# EAGLE board PCB101_A (EAGLE 9.3.1), part 1 of 2
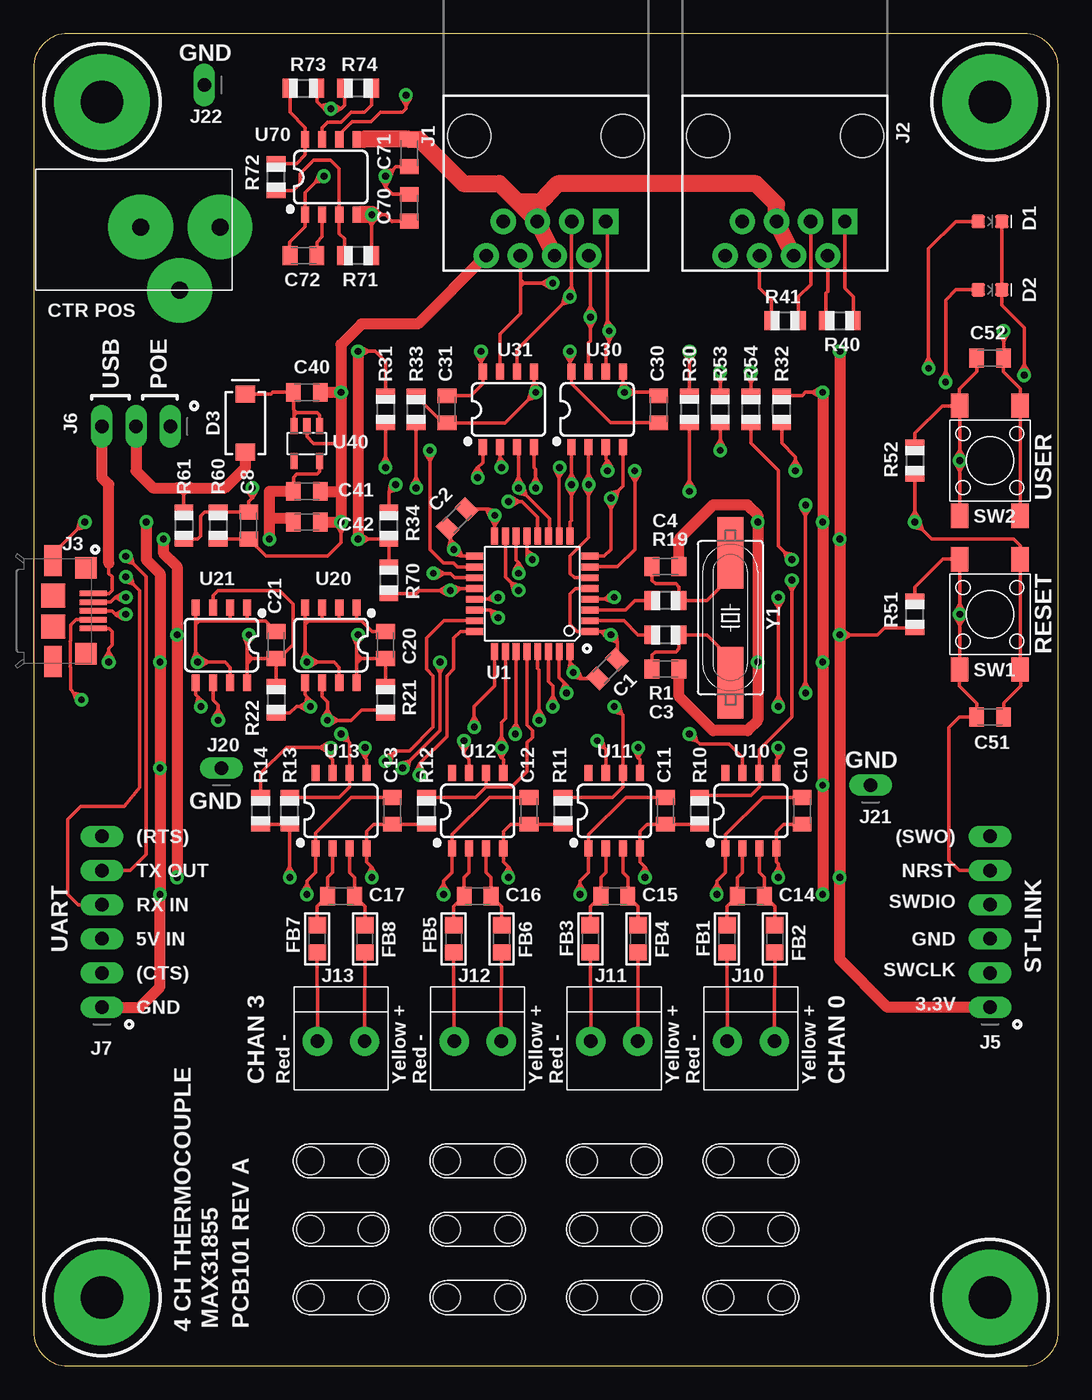
[diagram p0: board, top side]
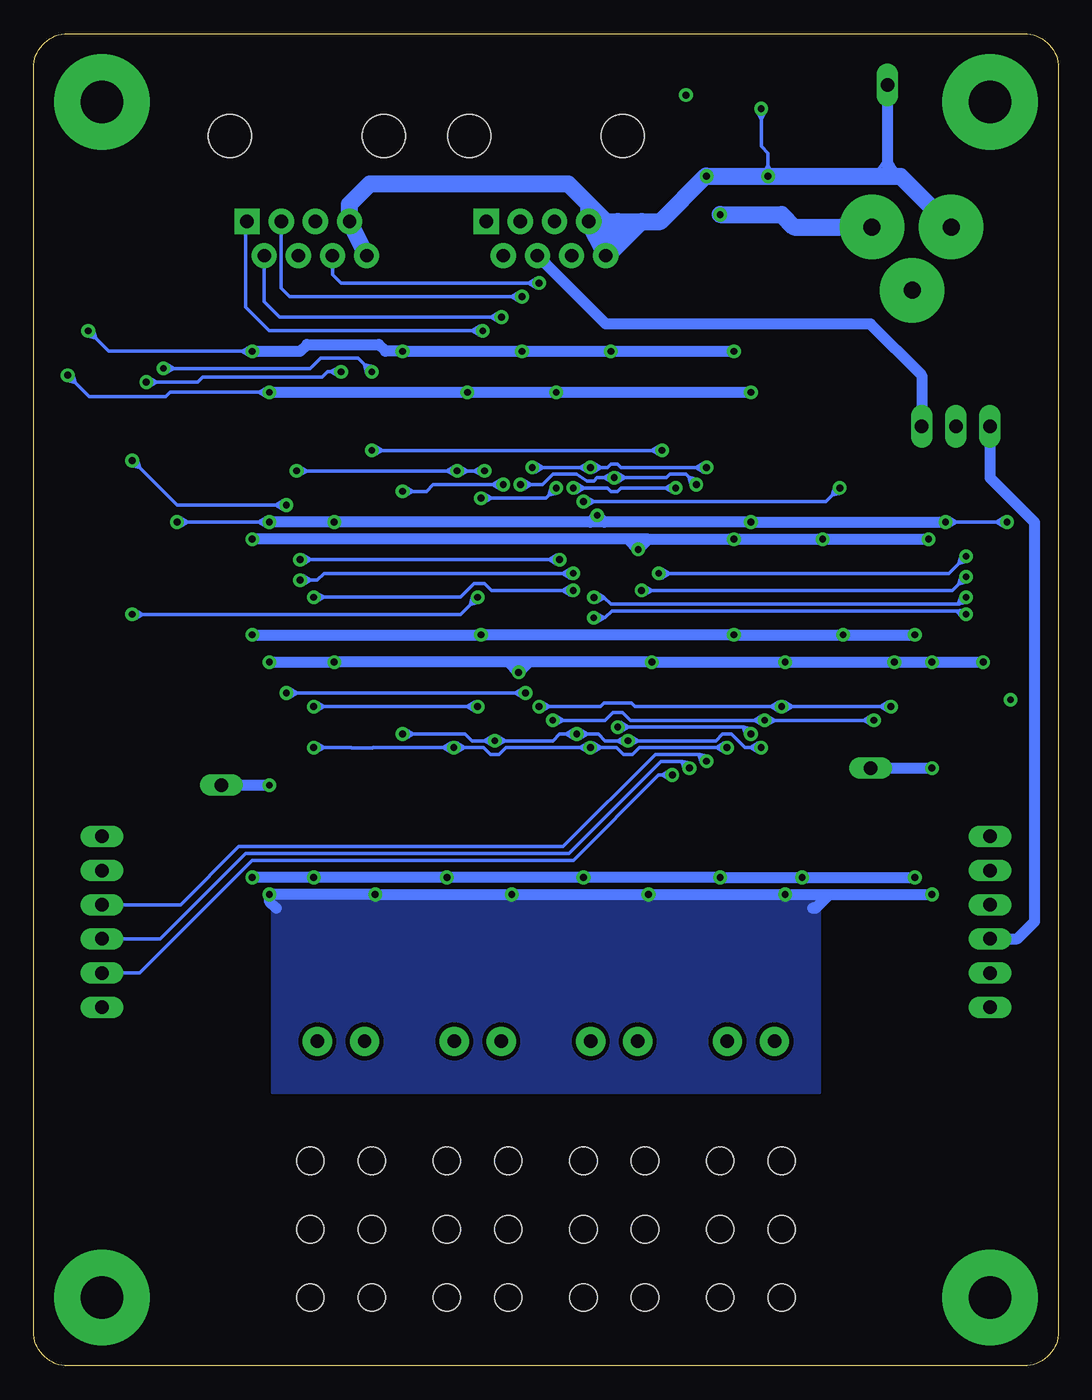
[diagram p1: board, bottom side, seen from below]

Size 76.2 x 99.06 mm. Coordinates in mm from the lower left corner, seen from the top.
Outline: 76.2,96.52 arc90 73.66,99.06 2.54,99.06 arc90 0,96.52 0,2.54 arc90 2.54,0 73.66,0 arc90 76.2,2.54 76.2,96.52
Copper layers (1*16): Top 0.035mm / dielectric 1.5mm / Bottom 0.035mm
Design rules "SparkFun-design-rules *": minimum track width 8mil, minimum drill 20mil, track to track 8mil, track to pad 8mil, pad to pad 8mil, via to via 8mil, smd to smd 8mil, copper to edge 10mil, drill to drill 8mil, minimum pad ring 12mil, minimum via ring 10mil, stop-mask expansion 4mil, vias tented up to drill 25mil, thermal gap 10mil
Net classes: 0 default: width 0.203 mm, clearance 0.203 mm; 1 pwr_gnd: width 0.813 mm, clearance 0.254 mm

## Footprints (pad centres in the part's own frame; a part is rotated, then mirrored left to right if it is on the bottom)
C0805K = smd 1.1 x 1.4: 1 -1,0; 2 1,0
LED-0603 = smd 1 x 1: A -0.877,0; C 0.877,0
SMA-DIODE = smd 1.27 x 1.47: A -2.15,0; C 2.15,0
_0805 = smd 1.2 x 1.3: 1 -1.016,0; 2 1.016,0
RJ45-8 = drill 1 pad 1.88 square: 1 -4.445,6.35 | drill 1 pad 1.88: 2 -3.175,8.89; 3 -1.905,6.35; 4 -0.635,8.89; 5 0.635,6.35; 6 1.905,8.89; 7 3.175,6.35; 8 4.445,8.89 | hole 3.2: -5.715,0; 5.715,0
1981584-1-LONG = smd 0.4 x 2: 1 -1.3,4.425; 2 -0.65,4.425; 3 0,4.425; 4 0.65,4.425; 5 1.3,4.425 | smd 1.8 x 1.8: M1 -1.15,1.45; M2 1.15,1.45 | smd 2.3 x 1.3: S1 -3.75,1.45; S2 3.75,1.45 | smd 1.6 x 1.6: S3 -3.2,3.885; S4 3.2,3.885
PJ-102A = drill 1.27 pad 4.8: RING 0.1,-3.39; RING_SW -4.6,-6.29; TIP 0.1,-9.29
1X06_OVAL = drill 1 long: 1 -6.35,0; 2 -3.81,0; 3 -1.27,0; 4 1.27,0; 5 3.81,0; 6 6.35,0
1X03_OVAL = drill 1 long: 1 -2.54,0; 2 0,0; 3 2.54,0
1X2-3.5MM = drill 1 pad 2.184: 1 1.75,0; 2 -1.75,0
1X01_OVAL = drill 1 long: 1 0,0
MTG_HOLE_C280_H125 = drill 3.175 pad 7.112: 1 0,0
HOLD_DOWN = hole 2.032: 2.286,0; -2.286,0
R0805 = smd 1.1 x 1.4: 1 -1,0; 2 1,0
PUSHBUTTON_6X6MM = smd 1.8 x 1.3: 1 -4.1,2.25; 2 4.1,2.25; 3 -4.1,-2.25; 4 4.1,-2.25
TQFP32-0.8MM = smd 1.27 x 0.508: 1 -4.293,2.8; 2 -4.293,2; 3 -4.293,1.2; 4 -4.293,0.4; 5 -4.293,-0.4; 6 -4.293,-1.2; 7 -4.293,-2; 8 -4.293,-2.8; 17 4.293,-2.8; 18 4.293,-2; 19 4.293,-1.2; 20 4.293,-0.4; 21 4.293,0.4; 22 4.293,1.2; 23 4.293,2; 24 4.293,2.8 | smd 0.508 x 1.27: 9 -2.8,-4.293; 10 -2,-4.293; 11 -1.2,-4.293; 12 -0.4,-4.293; 13 0.4,-4.293; 14 1.2,-4.293; 15 2,-4.293; 16 2.8,-4.293; 25 2.8,4.293; 26 2,4.293; 27 1.2,4.293; 28 0.4,4.293; 29 -0.4,4.293; 30 -1.2,4.293; 31 -2,4.293; 32 -2.8,4.293
SO08 = smd 0.6 x 1.2: 1 -1.905,-2.8; 2 -0.635,-2.8; 3 0.635,-2.8; 4 1.905,-2.8; 5 1.905,2.8; 6 0.635,2.8; 7 -0.635,2.8; 8 -1.905,2.8
SOT23-5L = smd 0.55 x 1.2: 1 -0.95,-1.3; 2 0,-1.3; 3 0.95,-1.3; 4 0.95,1.3; 5 -0.95,1.3
HC49UP = smd 5.334 x 1.93: 1 -4.826,0; 2 4.826,0

## Placement (x,y rotation side)
C1  0.1uF  [C0805K]  42.67,51.82 225 top
C2  0.1uF  [C0805K]  31.5,62.99 45 top
C3  10pF  [C0805K]  46.99,51.82 0 top
C4  10pF  [C0805K]  46.99,59.44 0 top
C8  0.1uF  [C0805K]  16,62.48 270 top
C10  0.1uF  [C0805K]  57.15,41.27 90 top
C11  0.1uF  [C0805K]  46.99,41.27 90 top
C12  0.1uF  [C0805K]  36.83,41.27 90 top
C13  0.1uF  [C0805K]  26.67,41.27 90 top
C14  0.01uF  [C0805K]  53.34,34.92 0 top
C15  0.01uF  [C0805K]  43.18,34.92 0 top
C16  0.01uF  [C0805K]  33.02,34.92 0 top
C17  0.01uF  [C0805K]  22.86,34.92 0 top
C20  0.1uF  [C0805K]  26.16,53.59 90 top
C21  0.1uF  [C0805K]  18.03,53.59 90 top
C30  0.1uF  [C0805K]  46.48,71.12 90 top
C31  0.1uF  [C0805K]  30.73,71.12 270 top
C40  1uF  [C0805K]  20.32,72.39 0 top
C41  10uF  [C0805K]  20.32,65.02 0 top
C42  10uF  [C0805K]  20.32,62.74 0 top
C51  0.1uF  [C0805K]  71.12,48.26 0 top
C52  0.1uF  [C0805K]  71.12,74.93 180 top
C70  10pF  [C0805K]  27.94,86.11 90 top
C71  10pF  [C0805K]  27.94,90.17 270 top
C72  10pF  [C0805K]  20.07,82.55 180 top
D1  GREEN  [LED-0603]  71.12,85.09 0 top
D2  RED  [LED-0603]  71.12,80.01 0 top
D3  3A/40V/500mV  [SMA-DIODE]  15.75,70.1 90 top
FB1  Ferrite  [_0805]  51.56,31.75 90 top
FB2  Ferrite  [_0805]  55.12,31.75 90 top
FB3  Ferrite  [_0805]  41.4,31.75 90 top
FB4  Ferrite  [_0805]  44.96,31.75 90 top
FB5  Ferrite  [_0805]  31.24,31.75 90 top
FB6  Ferrite  [_0805]  34.8,31.75 90 top
FB7  Ferrite  [_0805]  21.08,31.75 90 top
FB8  Ferrite  [_0805]  24.64,31.75 90 top
J1  RJ45  [RJ45-8]  38.1,91.44 180 top
J2  RJ45  [RJ45-8]  55.88,91.44 180 top
J3  1981584-1LONGPADS  [1981584-1-LONG]  0,56.13 270 top
J4  2.1MMJACKTHM  [PJ-102A]  4.57,84.58 90 top
J5  ST-LINK  [1X06_OVAL]  71.12,33.02 90 top
J6  HEADER-1X3  [1X03_OVAL]  7.62,69.85 180 top
J7  UART  [1X06_OVAL]  5.08,33.02 90 top
J10  1X2-3.5MM  [1X2-3.5MM]  53.34,24.13 180 top
J11  1X2-3.5MM  [1X2-3.5MM]  43.18,24.13 180 top
J12  1X2-3.5MM  [1X2-3.5MM]  33.02,24.13 180 top
J13  1X2-3.5MM  [1X2-3.5MM]  22.86,24.13 180 top
J20  HEADER-1X1  [1X01_OVAL]  13.97,44.45 90 top
J21  HEADER-1X1  [1X01_OVAL]  62.23,43.18 90 top
J22  HEADER-1X1  [1X01_OVAL]  12.7,95.25 180 top
MH1  4-40  [MTG_HOLE_C280_H125]  5.08,5.08 0 top
MH2  4-40  [MTG_HOLE_C280_H125]  71.12,5.08 0 top
MH3  4-40  [MTG_HOLE_C280_H125]  5.08,93.98 0 top
MH4  4-40  [MTG_HOLE_C280_H125]  71.12,93.98 0 top
MH5  HOLD_DOWN  [HOLD_DOWN]  53.34,15.24 0 top
MH6  HOLD_DOWN  [HOLD_DOWN]  53.34,10.16 0 top
MH7  HOLD_DOWN  [HOLD_DOWN]  53.34,5.08 0 top
MH8  HOLD_DOWN  [HOLD_DOWN]  43.18,15.24 0 top
MH9  HOLD_DOWN  [HOLD_DOWN]  43.18,10.16 0 top
MH10  HOLD_DOWN  [HOLD_DOWN]  43.18,5.08 0 top
MH11  HOLD_DOWN  [HOLD_DOWN]  33.02,15.24 0 top
MH12  HOLD_DOWN  [HOLD_DOWN]  33.02,10.16 0 top
MH13  HOLD_DOWN  [HOLD_DOWN]  33.02,5.08 0 top
MH14  HOLD_DOWN  [HOLD_DOWN]  22.86,15.24 0 top
MH15  HOLD_DOWN  [HOLD_DOWN]  22.86,10.16 0 top
MH16  HOLD_DOWN  [HOLD_DOWN]  22.86,5.08 0 top
R1  10K  [R0805]  46.99,54.36 180 top
R10  10K  [R0805]  49.53,41.27 90 top
R11  10K  [R0805]  39.37,41.27 90 top
R12  10K  [R0805]  29.21,41.27 90 top
R13  10K  [R0805]  19.05,41.27 90 top
R14  10K  [R0805]  16.89,41.27 90 top
R19  10K  [R0805]  46.99,56.9 180 top
R21  10K  [R0805]  26.16,49.53 270 top
R22  10K  [R0805]  18.03,49.53 270 top
R30  10K  [R0805]  48.77,71.12 270 top
R31  10K  [R0805]  26.16,71.12 270 top
R32  10K  [R0805]  55.63,71.12 90 top
R33  10K  [R0805]  28.45,71.12 90 top
R34  10K  [R0805]  26.42,62.48 90 top
R40  120  [R0805]  59.94,77.72 0 top
R41  120  [R0805]  55.88,77.72 0 top
R51  10K  [R0805]  65.53,55.88 90 top
R52  10K  [R0805]  65.53,67.31 270 top
R53  470  [R0805]  51.05,71.12 90 top
R54  470  [R0805]  53.34,71.12 90 top
R60  10K  [R0805]  13.72,62.48 270 top
R61  10K  [R0805]  11.18,62.48 270 top
R70  10K  [R0805]  26.42,58.42 270 top
R71  10K  [R0805]  24.13,82.55 180 top
R72  10K  [R0805]  18.03,88.39 90 top
R73  10K  [R0805]  20.07,95 0 top
R74  10K  [R0805]  24.13,95 180 top
SW1  PUSHBUTTON  [PUSHBUTTON_6X6MM]  71.12,55.88 270 top
SW2  PUSHBUTTON  [PUSHBUTTON_6X6MM]  71.12,67.31 270 top
U1  STM32F042K6  [TQFP32-0.8MM]  37.08,57.4 180 top
U10  MAX31855  [SO08]  53.34,41.27 0 top
U11  MAX31855  [SO08]  43.18,41.27 0 top
U12  MAX31855  [SO08]  33.02,41.27 0 top
U13  MAX31855  [SO08]  22.86,41.27 0 top
U20  EEPROM-I2C  [SO08]  22.1,53.59 180 top
U21  EEPROM-I2C  [SO08]  13.97,53.59 180 top
U30  ST3485  [SO08]  41.91,71.12 0 top
U31  ST3485  [SO08]  35.31,71.12 0 top
U40  LP298XS  [SOT23-5L]  20.32,68.58 180 top
U70  TPS25921  [SO08]  22.1,88.39 0 top
Y1  8MHz  [HC49UP]  51.82,55.63 90 top

## Library data of the parts
C1-C4 C8 C10-C17 C20 C21 C30 C31 C40-C42 C51 C52 C70-C72 R1 R10-R14 R19 R21 R22 R30-R34 R40 R41 R51-R54 R60 R61 R70-R74 U40 = adafruit
D1 = SparkFun-LED; PROD_ID: DIO-00821
D2 = SparkFun-LED; PROD_ID: DIO-00819
D3 = SparkFun-DiscreteSemi; PROD_ID: DIO-09886
FB1-FB8 = microbuilder
J1 J2 = SparkFun-Connectors; PROD_ID: CONN-08506; SF_ID: PRT-00643
J3-J7 J10-J13 J20-J22 MH1-MH16 SW1 SW2 U1 U10-U13 U20 U21 U70 = Thermocouple-board
U30 U31 = SparkFun-IC-Comms; PROD_ID: IC-09388
Y1 = SparkFun-Clocks; PROD_ID: XTAL-11706

## Nets
+3V3: C1.1 C2.1 C10.1 C11.1 C12.1 C13.1 C20.1 C21.1 C30.1 C31.1 C41.1 C42.1 C52.1 J5.1 R10.1 R11.1 R12.1 R13.1 R14.1 R21.1 R22.1 R30.1 R31.1 R34.1 R51.1 R70.1 SW2.1 SW2.2 U1.1 U1.5 U1.17 U10.4 U11.4 U12.4 U13.4 U20.8 U21.3 U21.8 U30.8 U31.8 U40.5
BTN_USER: C52.2 R52.1 SW2.3 SW2.4 U1.31
DN_LINK_A: J1.1 J2.1 R40.2 U30.6
DN_LINK_B: J1.2 J2.2 R40.1 U30.7
FLT_N: U70.6
GND: C1.2 C2.2 C3.2 C4.2 C8.2 C10.2 C11.2 C12.2 C13.2 C20.2 C21.2 C30.2 C31.2 C40.2 C41.2 C42.2 C51.2 C70.2 C71.2 C72.2 D1.C D2.C J1.7 J1.8 J2.7 J2.8 J3.5 J3.S1 J4.RING J5.3 J7.1 J20.1 J21.1 J22.1 R32.2 R33.2 R52.2 R60.2 R73.2 R74.2 SW1.1 SW1.2 U1.16 U1.32 U10.1 U11.1 U12.1 U13.1 U20.1 U20.2 U20.3 U20.4 U20.7 U21.1 U21.2 U21.4 U21.7 U30.5 U31.5 U40.2 U70.1
I2C_SCL: R21.2 U1.29 U20.6 U21.6
I2C_SDA: R22.2 U1.30 U20.5 U21.5
ILIM: R74.1 U70.7
LED_GRN: R53.1 U1.18
LED_RED: R54.1 U1.13
N$1: FB1.1 J10.1
N$2: R1.2 U1.2
N$3: R19.2 U1.3
N$4: C14.1 FB1.2 U10.2
N$5: FB2.1 J10.2
N$6: C14.2 FB2.2 U10.3
N$7: FB3.1 J11.1
N$8: C15.1 FB3.2 U11.2
N$9: FB4.1 J11.2
N$10: C15.2 FB4.2 U11.3
N$11: FB5.1 J12.1
N$12: C16.1 FB5.2 U12.2
N$13: FB6.1 J12.2
N$14: C16.2 FB6.2 U12.3
N$15: FB7.1 J13.1
N$16: C17.1 FB7.2 U13.2
N$17: FB8.1 J13.2
N$18: C17.2 FB8.2 U13.3
N$19: C4.1 R19.1 Y1.2
N$20: C3.1 R1.1 Y1.1
N$21: C40.1 D3.C U40.1 U40.3
N$25: D1.A R53.2
N$26: D2.A R54.2
OVP: R72.2 R73.1 U70.8
POE_PWR: C71.1 J1.4 J1.5 J2.4 J2.5 J6.1 U70.5
PWR_IN: D3.A J6.2 R61.1
PWR_SENSE: C8.1 R60.1 R61.2 U1.12
PWR_SRC: C70.1 J4.TIP R71.1 U70.4
RST_N: C51.1 J5.5 R51.2 SW1.3 SW1.4 U1.4
SPI_CS0_N: R10.2 U1.14 U10.6
SPI_CS1_N: R11.2 U1.15 U11.6
SPI_CS2_N: R12.2 U1.28 U12.6
SPI_CS3_N: R13.2 U1.25 U13.6
SPI_MISO: R14.2 U1.27 U10.7 U11.7 U12.7 U13.7
SPI_SCK: U1.26 U10.5 U11.5 U12.5 U13.5
SS: C72.1 U70.2
SWCLK: J5.2 U1.24
SWDIO: J5.4 U1.23
SWO: J5.6
UART1_RX: J7.4 R70.2 U1.20
UART1_TX: J7.5 U1.19
UART2_DE1: R32.1 U1.7 U30.3
UART2_DE2: R33.1 U1.11 U31.3
UART2_RE1_N: R30.2 U1.6 U30.2
UART2_RE2_N: R31.2 U1.10 U31.2
UART2_RX: R34.2 U1.9 U30.1 U31.1
UART2_TX: U1.8 U30.4 U31.4
UP_LINK_A: J1.3 J2.3 R41.2 U31.6
UP_LINK_B: J1.6 J2.6 R41.1 U31.7
USB_DM: J3.2 U1.21
USB_DP: J3.3 U1.22
USB_ID: J3.4
USB_VBUS: J3.1 J6.3 J7.3
UV: R71.2 R72.1 U70.3